# EAGLE board ethernet-relay-temp_v1.2 (EAGLE 9.2.2)
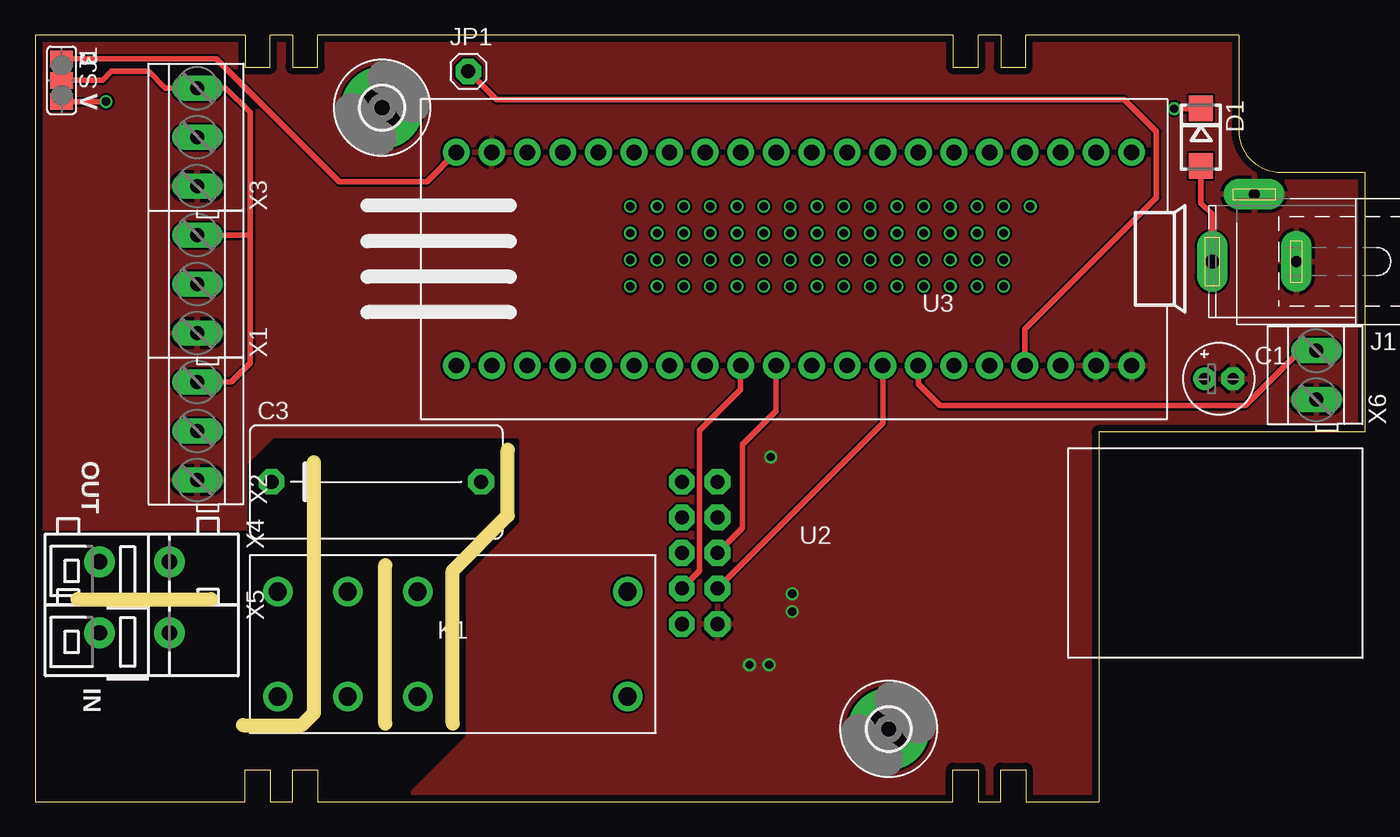
[diagram p0: board, top side]
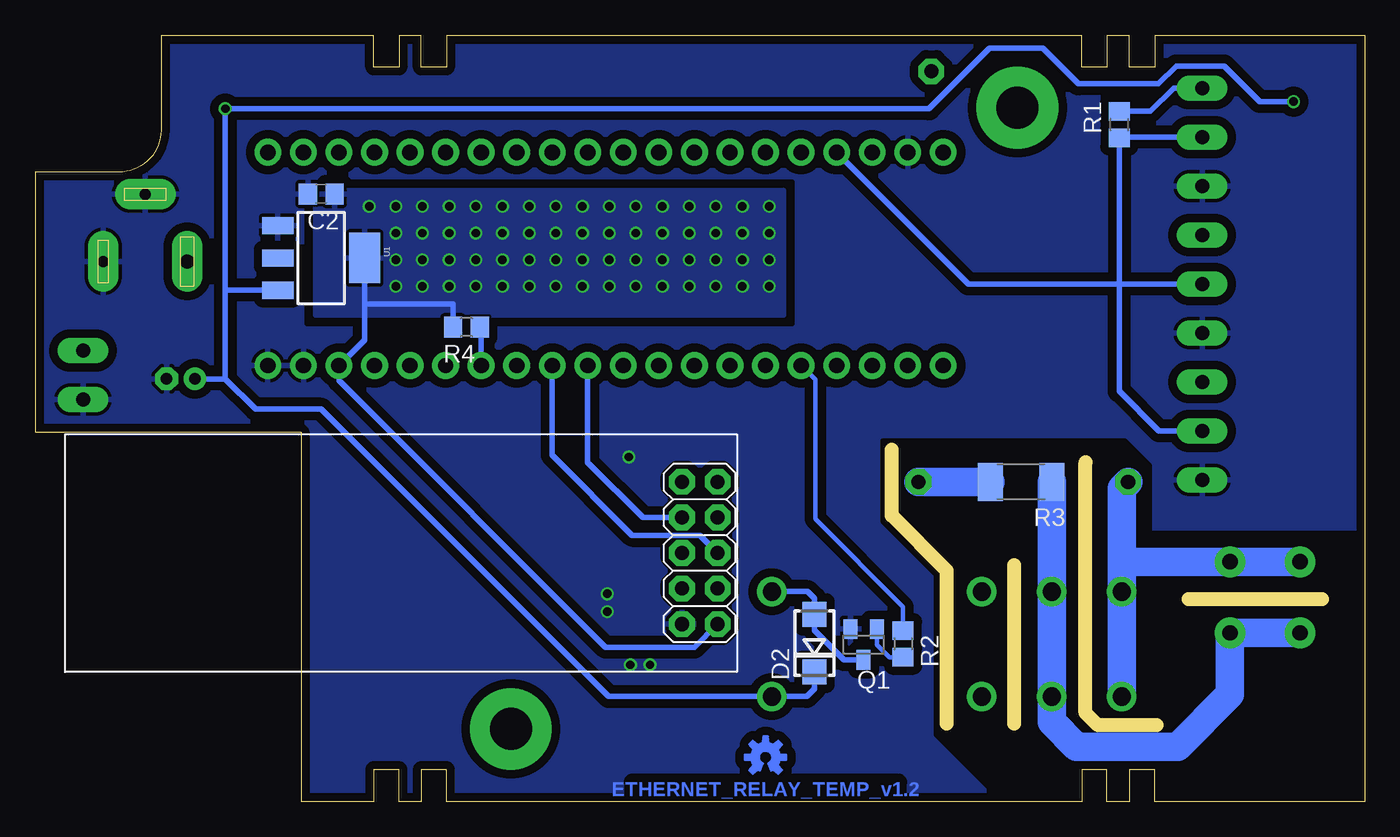
[diagram p1: board, bottom side, seen from below]

Size 95 x 54.8 mm. Coordinates in mm from the lower left corner, seen from the top.
Outline: 86,54.8 86,48 arc90 89,45 95,45 95,26.42 76,26.42 76,0 70.8,0 70.8,2.3 69,2.3 69,0 67.4,0 67.4,2.3 65.6,2.3 65.6,0 20.2,0 20.2,2.3 18.4,2.3 18.4,0 16.8,0 16.8,2.3 15,2.3 15,0 0,0 0,54.8 15,54.8 15,52.5 16.8,52.5 16.8,54.8 18.4,54.8 18.4,52.5 20.2,52.5 20.2,54.8 65.6,54.8 65.6,52.5 67.4,52.5 67.4,54.8 69,54.8 69,52.5 70.8,52.5 70.8,54.8 86,54.8
Copper layers (1*16): Top 0.035mm / dielectric 1.6mm / Bottom 0.035mm
Design rules "Elecrow_2-layer_PCB_eagle_rule *": minimum track width 6mil, minimum drill 12mil, track to track 6mil, track to pad 6mil, pad to pad 6mil, via to via 8mil, smd to smd 0mil, copper to edge 20mil, drill to drill 10mil, minimum pad ring 16mil, minimum via ring 6mil, stop-mask expansion 0mil, vias tented up to drill 100mil, thermal gap 10mil
Net classes: 1 220V: width 1.8 mm, clearance 0.2 mm
Milling: 8 lines

## Footprints (pad centres in the part's own frame; a part is rotated, then mirrored left to right if it is on the bottom)
E2-5 = drill 0.813 pad 1.27: + -1.016,0 | drill 0.813 pad 1.27 octagon: - 1.016,0
C0805 = smd 1.3 x 1.5: 1 -0.95,0; 2 0.95,0
C150-084X183 = drill 1.016 octagon: 1 -7.493,0; 2 7.493,0
DO214AC = smd 1.8 x 1.7: A 2.05,0; C -2.05,0
3,0-PAD = drill 3 pad 5.842: B3,0 0,0
SPC4077 = drill 0.8 pad 2.184 long: 1 -3,0; 2 0,-4.8 | drill 1 pad 2.184 long: 3 3,0
1X01 = drill 1.016 octagon: 1 0,0
RM85 = drill 1.3: 1 12.5,3.75; 2 12.5,-3.75; 11 -7.5,3.75; 12 -2.5,3.75; 14 -12.5,3.75; 21 -7.5,-3.75; 22 -2.5,-3.75; 24 -12.5,-3.75
SOT23-BEC = smd 1 x 1.4: B -0.95,-1.1; C 0,1.1; E 0.95,-1.1
R0805 = smd 1.3 x 1.5: 1 -0.95,0; 2 0.95,0
R2010 = smd 1.8 x 2.7: 1 -2.2,0; 2 2.2,0
SJ_2 = smd 1.168 x 1.6: 1 -1.524,0; 2 0,0; 3 1.524,0
SOT223 = smd 1.219 x 2.235: 1 -2.311,-3.099; 2 0,-3.099; 3 2.311,-3.099 | smd 3.6 x 2.2: 4 0,3.099
ENC28J60 = drill 1.016 octagon: CLK -23.622,5.08; CS -23.622,-2.54; GND -21.082,-5.08; NT -21.082,5.08; RST -21.082,-2.54; SCK -21.082,0; SI -23.622,0; SO -21.082,2.54; VCC -23.622,-5.08; WOL -23.622,2.54
STM32F103C8T6 = drill 1.1 pad 1.676: +3V3 -7.62,-19.05; +3V3@1 7.62,24.13; +5V 7.62,19.05; GND -7.62,-24.13; GND@1 -7.62,-21.59; GND@2 7.62,21.59; PA_0 -7.62,13.97; PA_1 -7.62,11.43; PA_2 -7.62,8.89; PA_3 -7.62,6.35; PA_4 -7.62,3.81; PA_5 -7.62,1.27; PA_6 -7.62,-1.27; PA_7 -7.62,-3.81; PA_8 7.62,-13.97; PA_9 7.62,-11.43; PA_10 7.62,-8.89; PA_11 7.62,-6.35; PA_12 7.62,-3.81; PA_15 7.62,-1.27; PB_0 -7.62,-6.35; PB_1 -7.62,-8.89; PB_3 7.62,1.27; PB_4 7.62,3.81; PB_5 7.62,6.35; PB_6 7.62,8.89; PB_7 7.62,11.43; PB_8 7.62,13.97; PB_9 7.62,16.51; PB_10 -7.62,-11.43; PB_11 -7.62,-13.97; PB_12 7.62,-24.13; PB_13 7.62,-21.59; PB_14 7.62,-19.05; PB_15 7.62,-16.51; PC_13 -7.62,21.59; PC_14 -7.62,19.05; PC_15 -7.62,16.51; RESET -7.62,-16.51; VBAT -7.62,24.13
KF350-3.50-3P = drill 1 long: 1 -3.5,0; 2 0,0; 3 3.5,0
236-4XX = drill 1.1 pad 2.2: 1@1 0,-2.5; 1@2 0,2.5
KF350-3.50-2P = drill 1 long: 1 -1.75,0; 2 1.75,0

## Placement (x,y rotation side)
C1  100uF  [E2-5]  84.58,30.23 0 top
C2  10uF  [C0805]  74.55,43.43 180 bottom
C3  R463I24705001K  [C150-084X183]  24.38,22.86 0 top
D1  SS16  [DO214AC]  83.31,47.5 270 top
D2  S1B  [DO214AC]  39.3,11.33 90 bottom
H1  MOUNT-PAD-ROUND3.0  [3,0-PAD]  61,5.2 0 top
H2  MOUNT-PAD-ROUND3.0  [3,0-PAD]  24.8,49.6 0 top
J1  [SPC4077]  87.12,38.61 180 top
JP1  [1X01]  30.95,52.2 0 top
K1  RM85-2021-35-1005  [RM85]  29.84,11.27 0 top
LOGO1  OSHW-LOGOS-COPPER  [OSHW-LOGO-S_COPPER]  42.8,3.17 0 bottom
Q1  BC817-40SMD  [SOT23-BEC]  35.8,11.24 180 bottom
R1  4K7  [R0805]  17.52,48.39 90 bottom
R2  1K  [R0805]  32.97,11.29 270 bottom
R3  160R  [R2010]  24.54,22.86 180 bottom
R4  10K  [R0805]  64.17,33.92 180 bottom
SJ1  [SJ_2]  1.91,51.56 270 top
U1  LM1117-3.3  [SOT223]  74.55,38.86 270 bottom
U2  ENC28J60-BREAKOUT  [ENC28J60]  69.85,17.78 0 top
U3  STM32F103C8T6-BREAKOUT  [STM32F103C8T6]  54.23,38.8 90 top
X1  KF350-3.50-3P  [KF350-3.50-3P]  11.6,37 90 top
X2  KF350-3.50-3P  [KF350-3.50-3P]  11.6,26.5 90 top
X3  KF350-3.50-3P  [KF350-3.50-3P]  11.6,47.5 90 top
X4  236-740-5,08  [236-4XX]  7.11,17.14 270 top
X5  236-740-5,08  [236-4XX]  7.11,12.06 270 top
X6  KF350-3.5-2P  [KF350-3.50-2P]  91.57,30.48 90 top

## Library data of the parts
C1-C3 = rcl; SPICEPREFIX: C
D1 = my-diode; A: 1; V: 60
D2 = my-diode; V: 70
H1 H2 = holes
J1 = con-jack; OC_FARNELL: unknown; OC_NEWARK: unknown
JP1 = pinhead
K1 = my-relay
LOGO1 = SparkFun-Aesthetics
Q1 = transistor-npn
R1-R4 = rcl; SPICEPREFIX: R
SJ1 = jumper
U1 = my-power
U2 U3 = my-modules
X1-X3 X6 = my-connectors
X4 X5 = con-wago

## Nets
1-WIRE: R1.1 U3.PB_9 X1.2 X2.2 X3.2
+3V3: C2.1 R4.2 SJ1.1 U1.2 U1.4 U2.VCC U3.+3V3 U3.+3V3@1
+5V: U3.+5V
A_TEMP: R4.1 U3.PB_1 X6.2
CS: U2.CS U3.PA_4
GND: C1.- C2.2 J1.1 J1.2 Q1.E U1.1 U2.GND U3.GND U3.GND@1 U3.GND@2 X1.1 X2.1 X3.1 X6.1
LED: U3.PC_13
LIN [220V]: K1.11 K1.21 R3.1 X5.1@1 X5.1@2
LOUT: C3.1 K1.14 K1.24 X4.1@1 X4.1@2
MISO: U2.SO U3.PA_6
MOSI: U2.SI U3.PA_7
N$1: JP1.1 U3.RESET
N$2: U2.RST U3.PB_0
N$3: C3.2 R3.2
N$5: D2.A K1.1 Q1.C
N$7: Q1.B R2.2
N$8: R1.2 SJ1.2 X1.3 X2.3 X3.3
N$9: D1.A J1.3
RELAY: R2.1 U3.PA_0
SCK: U2.SCK U3.PA_5
VBAT: U3.VBAT
VCC: C1.+ D1.C D2.C K1.2 SJ1.3 U1.3

## Tracks (layer width: path | path; a pad name or v marks a point on that pad's centre or on a via)
1-WIRE
  Bottom 0.406: X1.2 17.52,37 | X2.2 14.69,26.5 17.52,29.34 17.52,37 | X3.2 17.52,47.5 R1.1 17.52,37 | 17.52,37 28.31,37 U3.PB_9
+3V3  (via drill 0.6)
  Top 0.406: SJ1.1 12.95,53.09 21.72,44.32 28.01,44.32 U3.+3V3@1
  Bottom 0.406: 71.45,35.56 71.45,33.01 U3.+3V3 73.28,30.1 54.23,11.05 47.88,11.05 U2.VCC | 71.45,35.56 U1.4 | R4.2 65.12,35.56 71.45,35.56
  other vias: 42.55,42.55 44.45,42.55 46.35,42.55 48.26,42.55 50.16,42.55 52.07,42.55 53.98,42.55 55.88,42.55 57.78,42.55 59.69,42.55 61.59,42.55 63.5,42.55 65.41,42.55 67.31,42.55 69.22,42.55 71.12,42.55 69.22,40.64 67.31,40.64 65.41,40.64 63.5,40.64 61.59,40.64 59.69,40.64 57.78,40.64 55.88,40.64 53.98,40.64 52.07,40.64 50.16,40.64 48.26,40.64 46.35,40.64 44.45,40.64 42.55,40.64 42.55,38.73 44.45,38.73 46.35,38.73 48.26,38.73 50.16,38.73 52.07,38.73 53.98,38.73 55.88,38.73 57.78,38.73 59.69,38.73 61.59,38.73 63.5,38.73 65.41,38.73 67.31,38.73 69.22,38.73 69.22,36.83 67.31,36.83 65.41,36.83 63.5,36.83 61.59,36.83 59.69,36.83 57.78,36.83 55.88,36.83 53.98,36.83 52.07,36.83 50.16,36.83 48.26,36.83 46.35,36.83 44.45,36.83 42.55,36.83
  pour Bottom: 41.53,43.69 74.93,43.69 74.93,34.8 41.53,34.8
A_TEMP
  Top 0.406: U3.PB_1 63.12,29.85 63.12,29.84 64.64,28.32 86.49,28.32 90.4,32.23 X6.2
  Bottom 0.406: U3.PB_1 63.12,33.82 R4.1
CS
  Top 0.406: U2.CS 47.5,16.51 47.5,26.54 50.42,29.47 U3.PA_4
GND  (via drill 0.6)
  other vias: 52.45,9.78 54.1,13.59 54.1,14.86 51.05,9.78 52.58,24.64
  pour Top: 0,0 95,0 95,55 0,55
  pour Bottom (isolate 0.61, rank 2): 0,0 0,55 95,55 95,0
  cutout Bottom: 0.25,19.18 0.25,0.13 25.91,0.13 30.61,4.83 30.61,16.26 34.42,20.07 34.42,25.78 17.14,25.78 15.37,24 15.37,19.18
  cutout Top: 0.25,19.18 0.25,0.13 25.91,0.13 30.61,4.83 30.61,16.26 34.42,20.07 34.42,25.78 17.14,25.78 15.37,24 15.37,19.18
LIN
  Bottom 2.032: X5.1@1 X5.1@2 9.61,7.66 13.34,3.94 20.57,3.94 22.34,5.71 K1.21 K1.11 R3.1
LOUT
  Bottom 2.032: 17.34,17.14 K1.14 K1.24 | X4.1@1 6.73,17.14 | 6.73,17.14 X4.1@2 | 17.34,17.14 17.34,22.41 C3.1 | 6.73,17.14 17.34,17.14
MISO
  Bottom 0.406: U3.PA_6 55.5,24.26 51.56,20.32 U2.SO
MOSI
  Bottom 0.406: U3.PA_7 58.04,24.77 52.32,19.05 47.5,19.05 U2.SI
N$1
  Top 0.406: U3.RESET 70.74,33.78 80.14,43.18 80.14,47.88 77.85,50.16 32.99,50.16 JP1.1
N$2
  Top 0.406: U2.RST 60.58,27.05 U3.PB_0
N$3
  Bottom 2.032: R3.2 C3.2
N$5
  Bottom 0.406: Q1.C 37.19,10.14 39.3,12.25 D2.A 39.3,14.54 39.79,15.02 K1.1
N$7
  Bottom 0.305: R2.2 33.96,10.34 34.85,11.22 Q1.B
N$8
  Top 0.406: 15.37,40.51 15.37,49.28 13.64,51 X3.3 9.32,51 8.13,52.2 5.46,52.2 4.83,51.56 SJ1.2 | 15.37,40.51 15.37,31.37 14,30 X2.3 | X1.3 15.36,40.5 15.37,40.51
  Bottom 0.406: X3.3 13.64,51 15.31,49.34 R1.2
N$9
  Top 0.406: J1.3 84.12,41.99 83.31,42.8 D1.A
RELAY
  Bottom 0.305: R2.1 32.97,13.92 39.24,20.2 39.24,30.16 U3.PA_0
SCK
  Top 0.406: U2.SCK 50.55,19.56 50.55,25.53 52.96,27.94 U3.PA_5
VCC  (via drill 0.6)
  Top 0.406: v81.41,49.53 81.42,49.55 D1.C | SJ1.3 v5.08,50.04
  Bottom 0.406: D2.C 39.3,8.07 39.85,7.52 K1.2 54,7.52 74.55,28.07 79.25,28.07 81.41,30.23 | 81.41,30.23 C1.+ | 81.41,36.45 v81.41,49.53 31.11,49.53 26.8,53.85 22.99,53.85 20.45,51.31 14.73,51.31 13.46,52.58 10.03,52.58 7.49,50.04 v5.08,50.04 | 81.41,36.45 81.41,30.23 | 81.41,36.45 81.31,36.55 U1.3

## Text on the board
Bottom: ETHERNET_RELAY_TEMP_v1.2
tPlace: 3 | V | OUT | IN
tStop: + | D | - | + | D | - | + | D | -